# EAGLE board untitled (EAGLE 5.10)
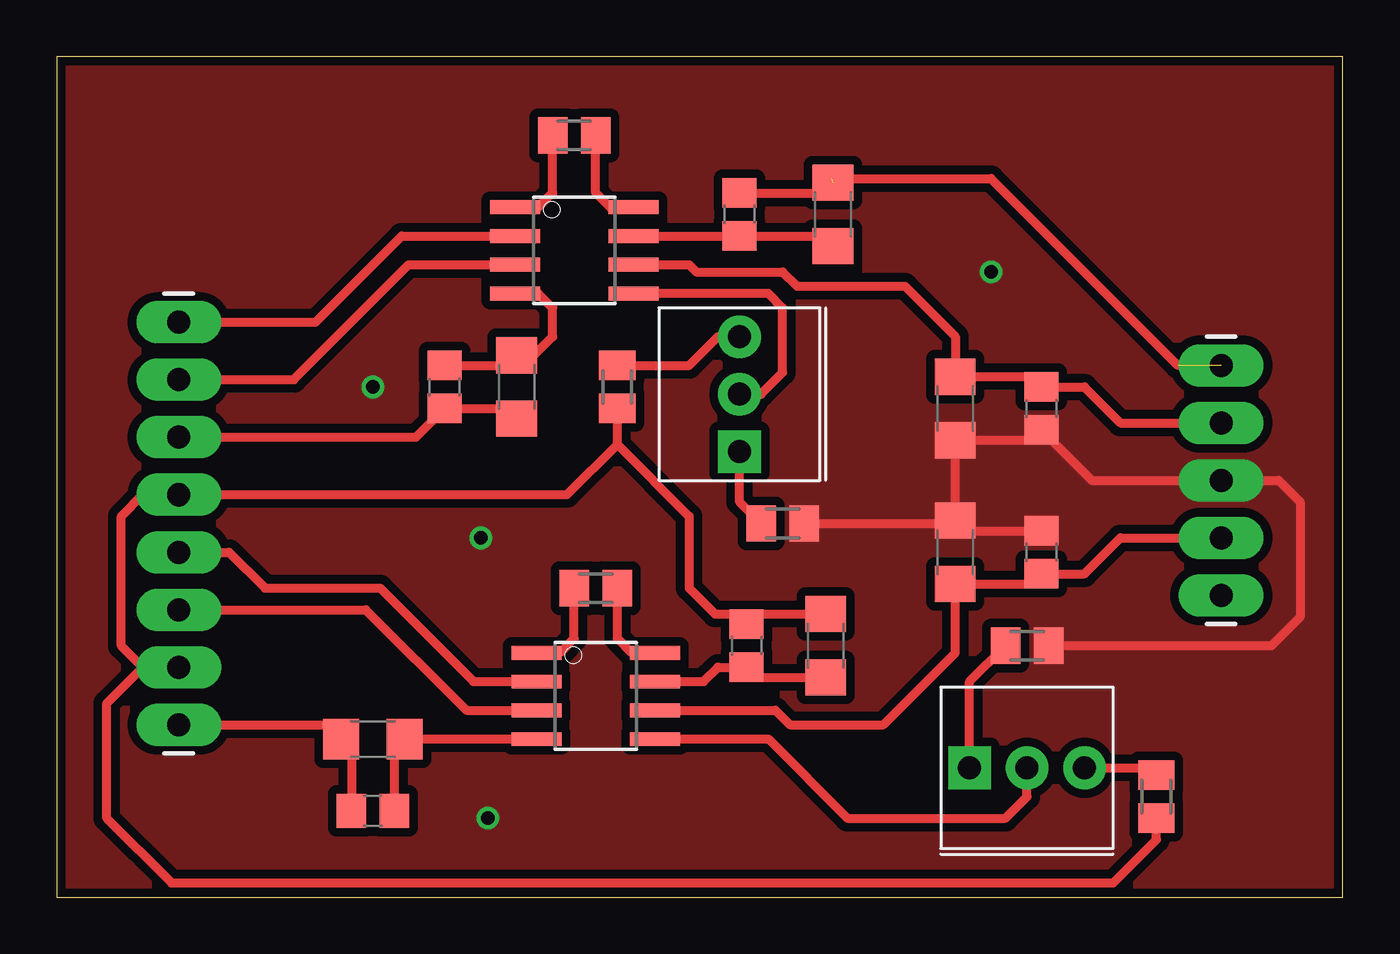
[diagram p0: board, top side]
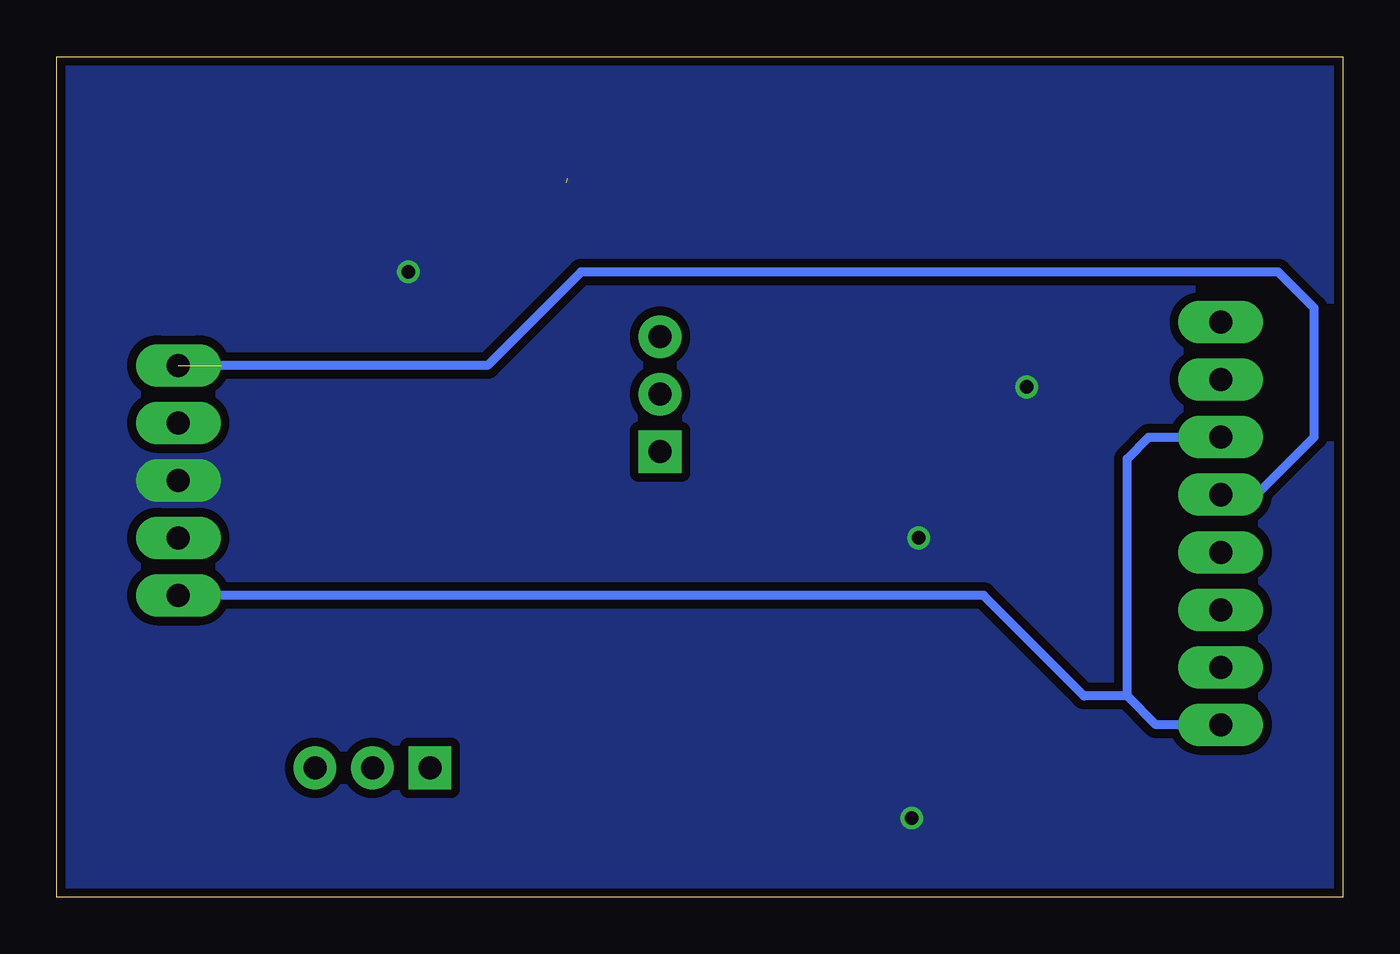
[diagram p1: board, bottom side, seen from below]

Size 56.81 x 37.13 mm. Coordinates in mm from the lower left corner, seen from the top.
Outline: 0,0 56.81,0 56.81,37.13 0,37.13 0,0
Copper layers (1*16): Top 0.035mm / dielectric 1.5mm / Bottom 0.035mm
Design rules "default *": minimum track width 8mil, minimum drill 14mil, track to track 8mil, track to pad 8mil, pad to pad 8mil, via to via 8mil, smd to smd 0mil, copper to edge 5mil, drill to drill 8mil, minimum pad ring 10mil, minimum via ring 8mil, stop-mask expansion 4mil, vias tented up to drill 0mil, thermal gap 10mil

## Footprints (pad centres in the part's own frame; a part is rotated, then mirrored left to right if it is on the bottom)
C0805 = smd 1.3 x 1.5: 1 -0.95,0; 2 0.95,0
C1206 = smd 1.6 x 1.8: 1 -1.4,0; 2 1.4,0
SO08 = smd 0.61 x 2.21: 1 -1.905,-2.616; 2 -0.635,-2.616; 3 0.635,-2.616; 4 1.905,-2.616; 5 1.905,2.616; 6 0.635,2.616; 7 -0.635,2.616; 8 -1.905,2.616
1X08_LONGPADS = drill 1.016 pad 1.88 long: 1 0,0; 2 2.54,0; 3 5.08,0; 4 7.62,0; 5 10.16,0; 6 12.7,0; 7 15.24,0; 8 17.78,0
1X05_LONGPADS = drill 1.016 pad 1.88 long: 1 0,0; 2 2.54,0; 3 5.08,0; 4 7.62,0; 5 10.16,0
M0805 = smd 1.3 x 1.6: 1 -0.95,0; 2 0.95,0
3362U = drill 1.016 pad 1.88 square: P$1 0,2.54 | drill 1.016 pad 1.88 round: P$2 2.54,2.54; P$3 5.08,2.54

## Placement (x,y rotation side)
C1  100nF  [C0805]  30.48,11.11 90 top
C2  100nF  [C0805]  13.97,3.81 180 top
C3  100nF  [C0805]  30.16,30.16 90 top
C4  1uF  [C0805]  17.14,22.54 270 top
C5  1uF  [C1206]  13.97,6.99 180 top
C6  1uF  [C1206]  33.97,11.11 90 top
C7  1uF  [C1206]  34.29,30.16 90 top
C8  100nF  [C1206]  20.32,22.54 270 top
C9  100nF  [C0805]  43.5,15.24 90 top
C10  1uF  [C1206]  39.69,15.24 90 top
C11  100nF  [C0805]  43.5,21.59 270 top
C12  1uF  [C1206]  39.69,21.59 270 top
IC1  INA126U  [SO08]  22.86,28.57 270 top
IC2  INA129U  [SO08]  23.81,8.89 270 top
JP1  ANALOG IN  [1X08_LONGPADS]  5.4,7.62 90 top
JP2  OUTPUT/SUPPLY  [1X05_LONGPADS]  51.44,13.34 90 top
R1  [M0805]  22.86,33.66 180 top
R2  [M0805]  32.07,16.51 180 top
R3  [M0805]  24.77,22.54 270 top
R4  [M0805]  48.58,4.45 270 top
R5  [M0805]  42.86,11.11 180 top
R6  [M0805]  23.81,13.65 0 top
U$1  [3362U]  40.32,3.17 0 top
U$2  [3362U]  32.7,19.68 90 top

## Library data of the parts
C1-C12 R1-R6 = rcl
IC1 IC2 = burr-brown
JP1 JP2 U$1 U$2 = SparkFun

## Nets
+5V: C1.2 C3.2 C6.2 C7.2 JP1.2 JP1.5 JP2.5 R3.2 R4.2
-5V: C2.2 C4.2 C5.2 C8.2 JP1.1 JP1.6 JP2.1
CURR_IN+: IC2.3 JP1.3
CURR_IN-: IC2.2 JP1.4
CURR_OUT: C9.1 C10.1 IC2.6 JP2.2
GND: C9.2 C10.2 C11.2 C12.2 JP2.3 R2.1 R5.1
LOAD_IN+: IC1.3 JP1.7
LOAD_IN-: IC1.2 JP1.8
LOAD_OUT: C11.1 C12.1 IC1.6 JP2.4
N$1: IC1.1 R1.2
N$2: IC1.8 R1.1
N$3: IC2.8 R6.2
N$4: IC2.1 R6.1
N$5: C2.1 C5.1 IC2.4
N$6: C1.1 C6.1 IC2.7
N$9: R5.2 U$1.P$1
N$10: R4.1 U$1.P$3
N$11: IC2.5 U$1.P$2
N$12: C4.1 C8.1 IC1.4
N$13: C3.1 C7.1 IC1.7
N$15: IC1.5 U$2.P$2
N$16: R3.1 U$2.P$3
N$17: R2.2 U$2.P$1

## Tracks (layer width: path | path; a pad name or v marks a point on that pad's centre or on a via)
+5V  (2 unrouted)
  Top 0.406: C3.2 33.52,31.11 C7.2 | 30.93,12.51 C6.2 | 30.93,12.51 C1.2 | 24.77,20 22.54,17.78 JP1.5 3.81,17.78 2.86,16.83 2.86,11.11 3.81,10.16 | 24.77,20 R3.2 | 30.93,12.51 29.08,12.51 27.94,13.65 27.94,16.83 24.77,20 | 49.53,23.5 41.27,31.75 34.24,31.75 33.72,31.23 | 3.81,10.16 JP1.2 | R4.2 48.58,2.54 46.67,0.64 5.08,0.64 2.22,3.49 2.22,8.57 3.81,10.16
  Bottom 0.406: JP2.5 37.78,23.5 33.66,27.62 2.86,27.62 1.27,26.04 1.27,20.32 3.81,17.78 JP1.5
-5V
  Top 0.406: C8.2 19.87,21.59 C4.2 15.87,20.32 JP1.6 | C2.2 13.02,6.54 C5.2 11.94,7.62 JP1.1
  Bottom 0.406: JP1.6 8.57,20.32 9.53,19.37 9.53,8.89 | 9.53,8.89 8.26,7.62 JP1.1 | JP2.1 15.88,13.34 11.43,8.89 9.53,8.89
CURR_IN+
  Top 0.406: JP1.3 13.65,12.7 18.1,8.26 IC2.3
CURR_IN-
  Top 0.406: IC2.2 18.41,9.53 14.29,13.65 9.21,13.65 7.62,15.24 JP1.4
CURR_OUT
  Top 0.406: IC2.6 31.75,8.26 32.38,7.62 36.51,7.62 39.69,10.79 C10.1 43.05,13.84 C9.1 45.4,14.29 46.99,15.88 JP2.2
GND  (via drill 0.6)
  Top 0.406: R2.1 39.56,16.51 C10.2 | C10.2 C12.2 43.05,20.19 C11.2 45.72,18.41 JP2.3 53.98,18.41 54.93,17.46 54.93,12.38 53.66,11.11 R5.1 | C9.2 40.14,16.19 C10.2
  other vias: 13.97,22.54 18.73,15.88 41.27,27.62 19.05,3.49
  pour Bottom (isolate 0.381, no thermals): 0,37.15 0,0 56.83,0 56.83,37.15 41.59,37.15
  pour Top (isolate 0.381, no thermals): 0,37.15 0,0 56.83,0 56.83,37.15 41.59,37.15
LOAD_IN+
  Top 0.406: IC1.3 15.56,27.94 10.48,22.86 JP1.7
LOAD_IN-
  Top 0.406: IC1.2 15.24,29.21 11.43,25.4 JP1.8
LOAD_OUT
  Top 0.406: IC1.6 27.94,27.94 28.26,27.62 32.07,27.62 32.7,26.99 37.47,26.99 39.69,24.77 C12.1 43.05,22.99 C11.1 45.4,22.54 46.99,20.95 JP2.4
N$1
  Top 0.406: R1.2 21.91,31.12 21.27,30.48 IC1.1
N$2
  Top 0.406: IC1.8 24.45,30.48 23.81,31.11 R1.1
N$3
  Top 0.406: IC2.8 25.4,10.79 24.77,11.43 R6.2
N$4
  Top 0.406: IC2.1 22.23,10.79 22.86,11.43 R6.1
N$5
  Top 0.406: IC2.4 C5.1 14.92,6.54 C2.1
N$6
  Top 0.406: IC2.7 28.57,9.53 29.21,10.16 C1.1 30.93,9.71 C6.1
N$9
  Top 0.406: U$1.P$1 40.33,9.53 R5.2
N$10
  Top 0.406: R4.1 48.26,5.71 U$1.P$3
N$11
  Top 0.406: IC2.5 31.43,6.99 34.92,3.49 41.91,3.49 42.86,4.45 U$1.P$2
N$12
  Top 0.406: C4.1 19.87,23.49 C8.1 20.45,23.81 20.95,23.81 21.91,24.77 21.91,26.04 21.27,26.67 IC1.4
N$13
  Top 0.406: IC1.7 C3.1 33.52,29.21 C7.1
N$15
  Top 0.406: U$2.P$2 31.11,22.23 32.07,23.18 32.07,26.04 31.43,26.67 IC1.5
N$16
  Top 0.406: U$2.P$3 29.21,24.77 27.94,23.5 R3.1
N$17
  Top 0.406: U$2.P$1 30.16,17.46 R2.2